# Altium PCB PCB.PcbDoc
Units mm, origin at the board's own origin, x right, y up, seen from the top; angles counter-clockwise.
Board outline 100 x 90 mm, 2 copper layers (Top Layer, Bottom Layer); 61 components, 49 nets, 220 pads, 258 vias.
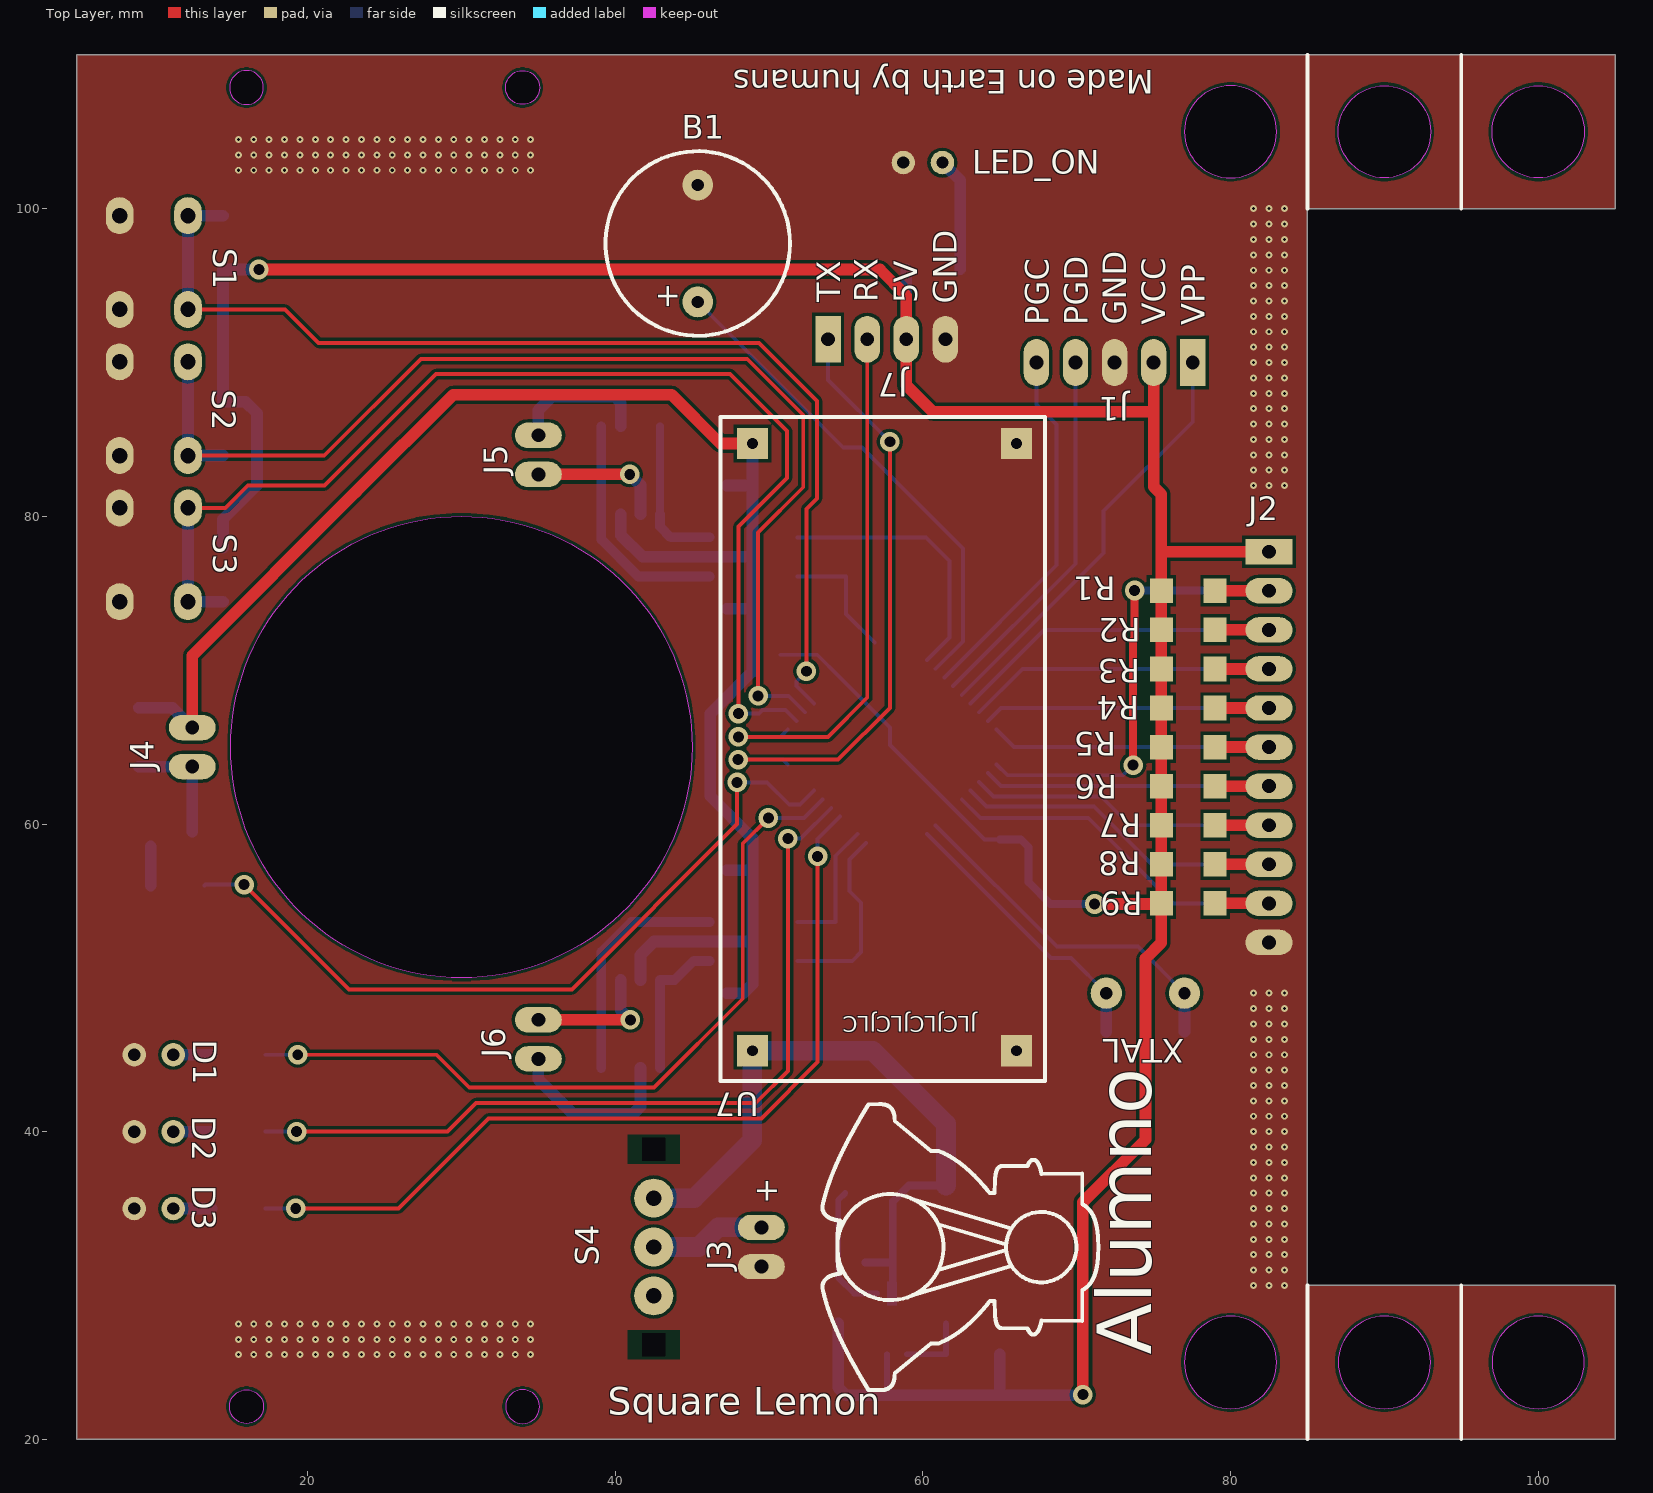
[diagram p0: Top Layer view]
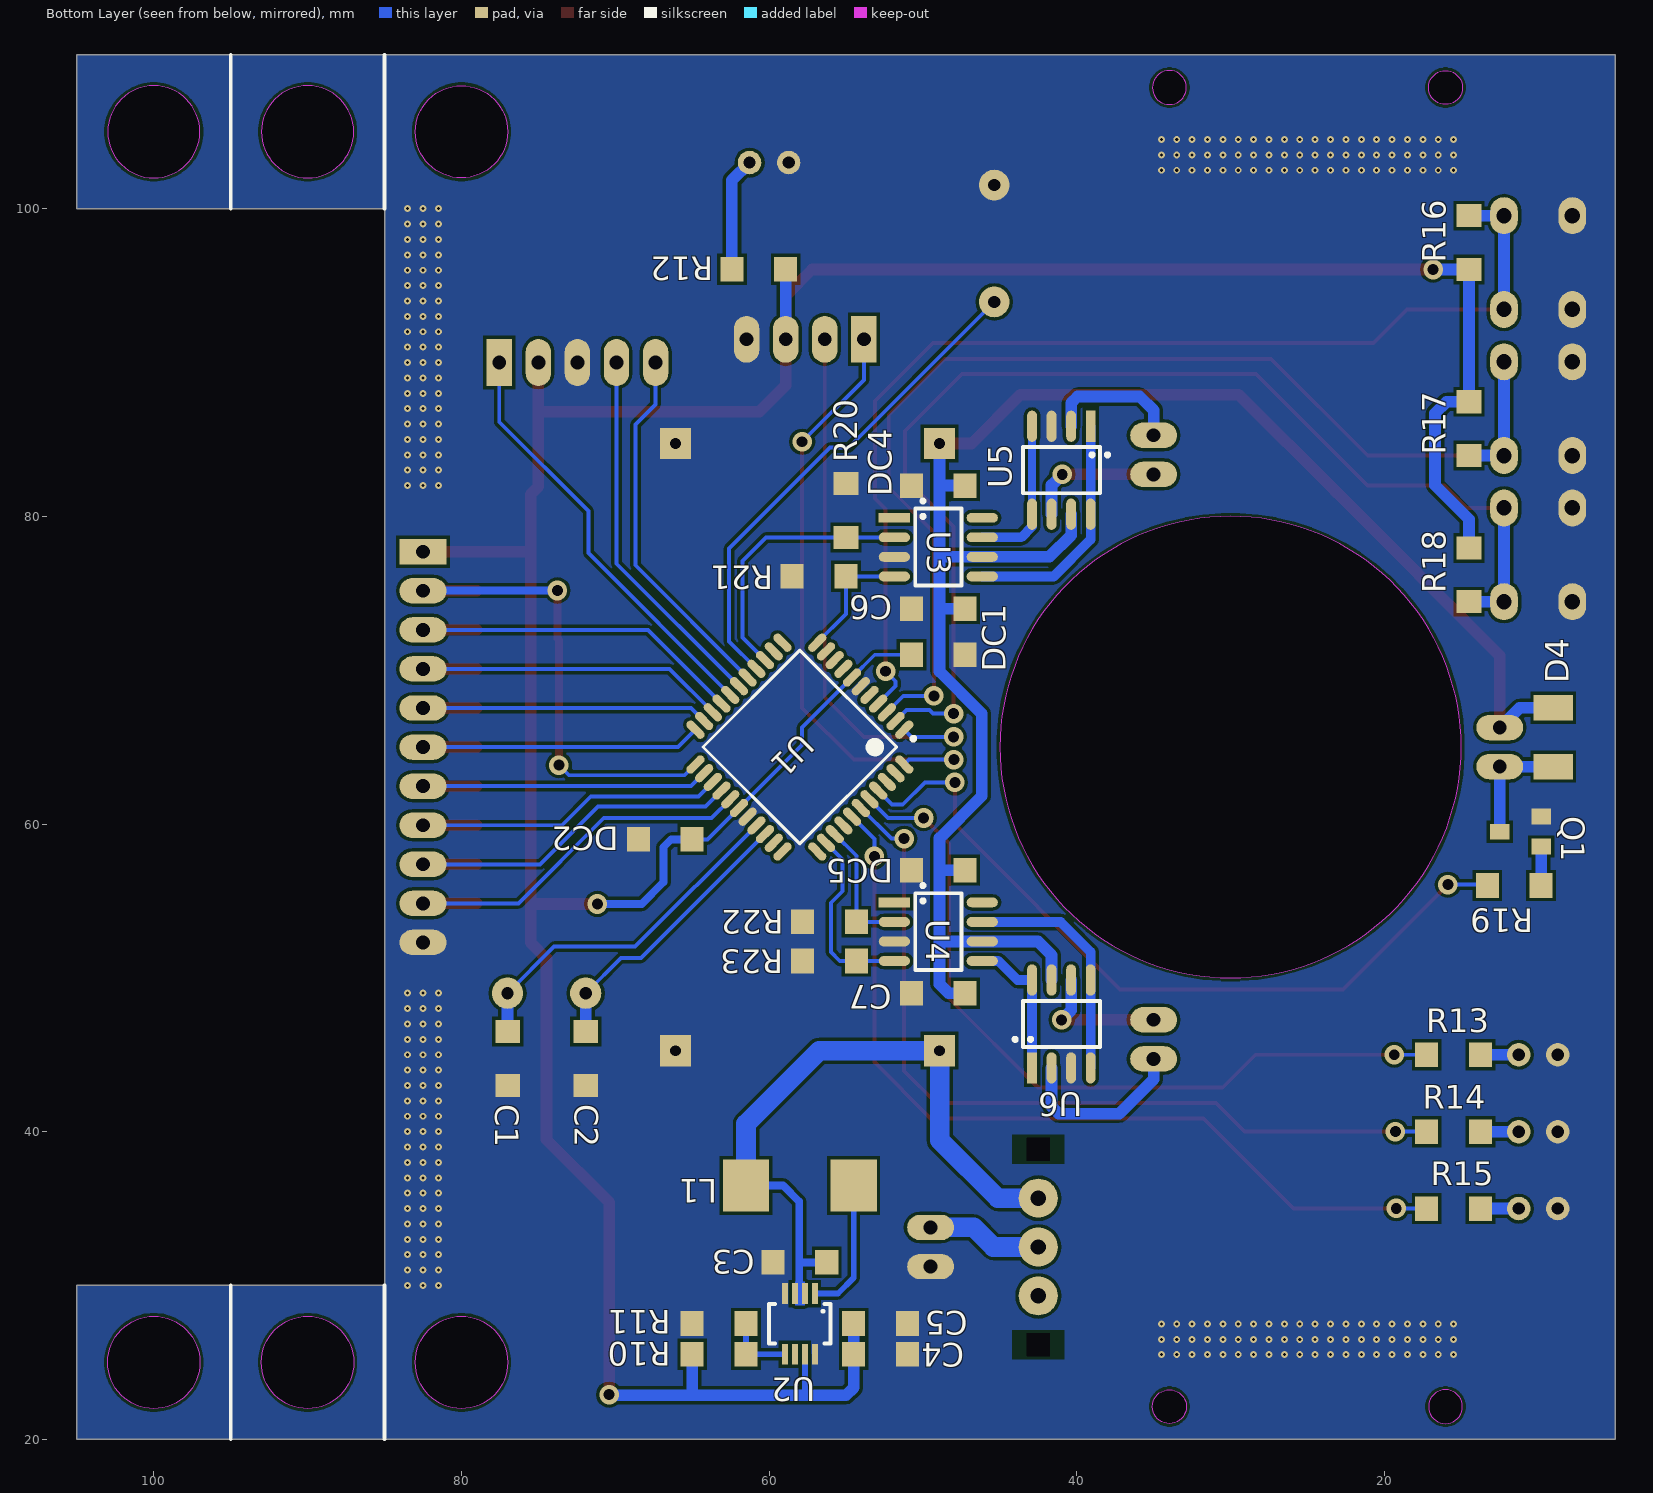
[diagram p1: Bottom Layer view, seen from below]
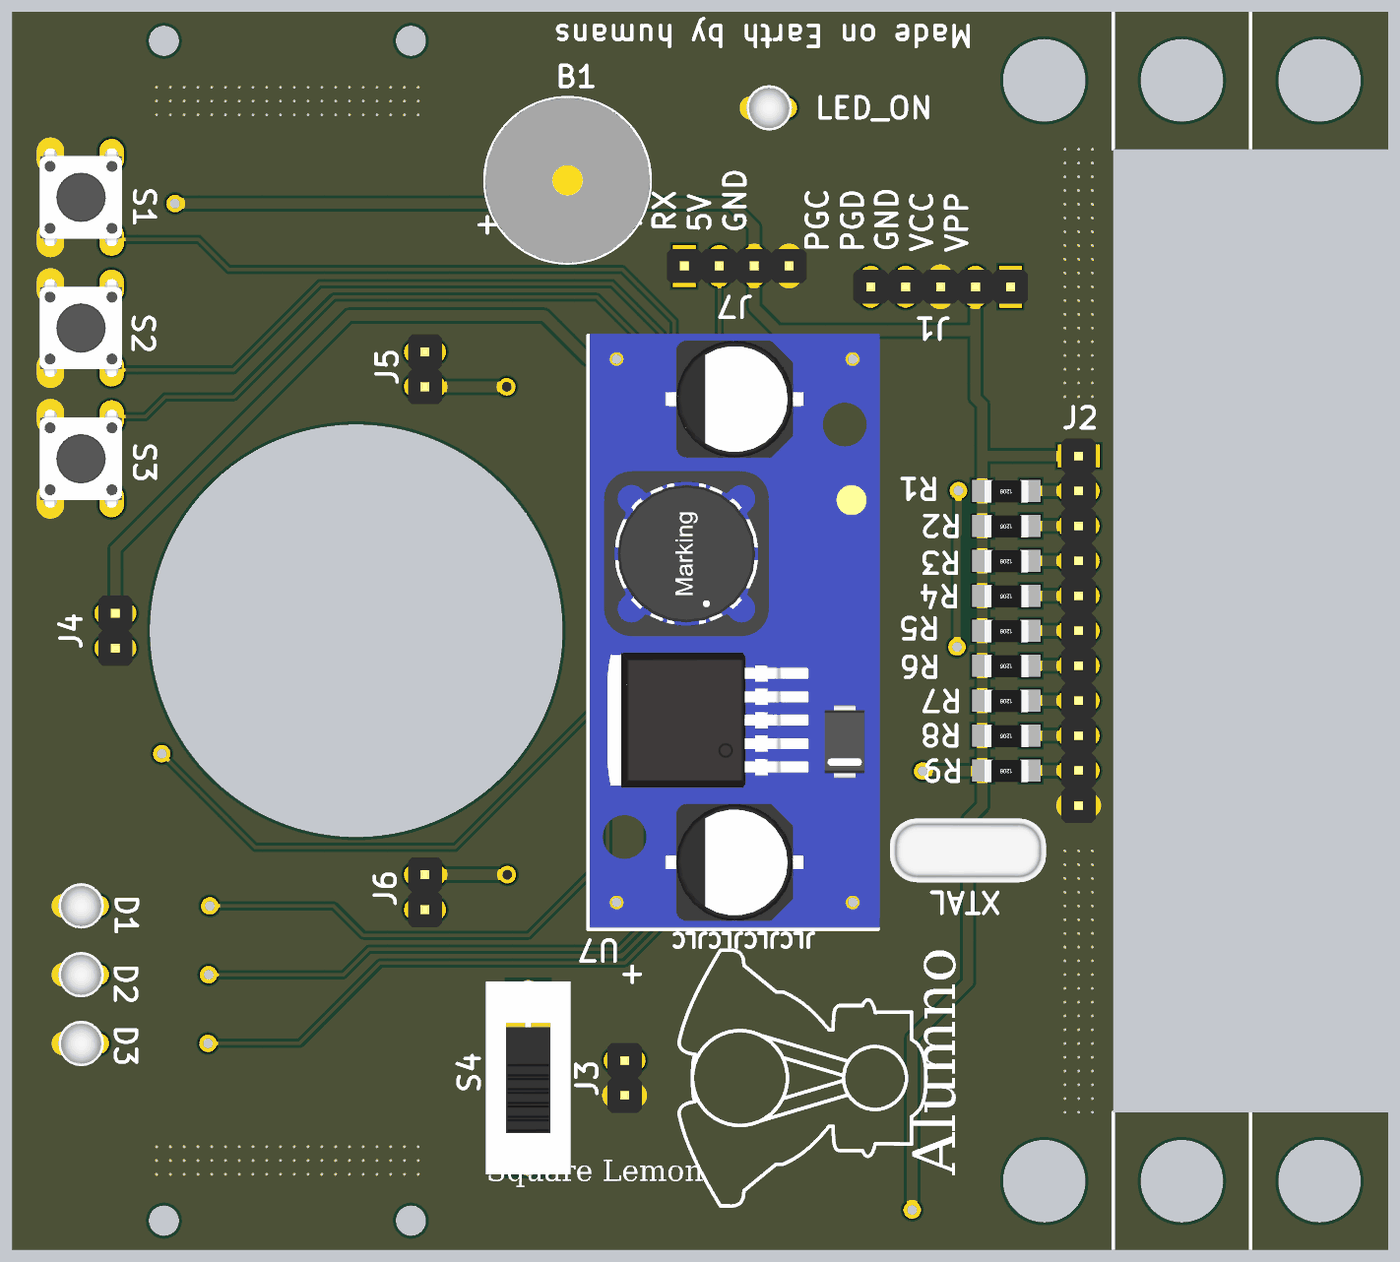
[diagram p2: 3D render of the assembled board from above, using the file's embedded part models]
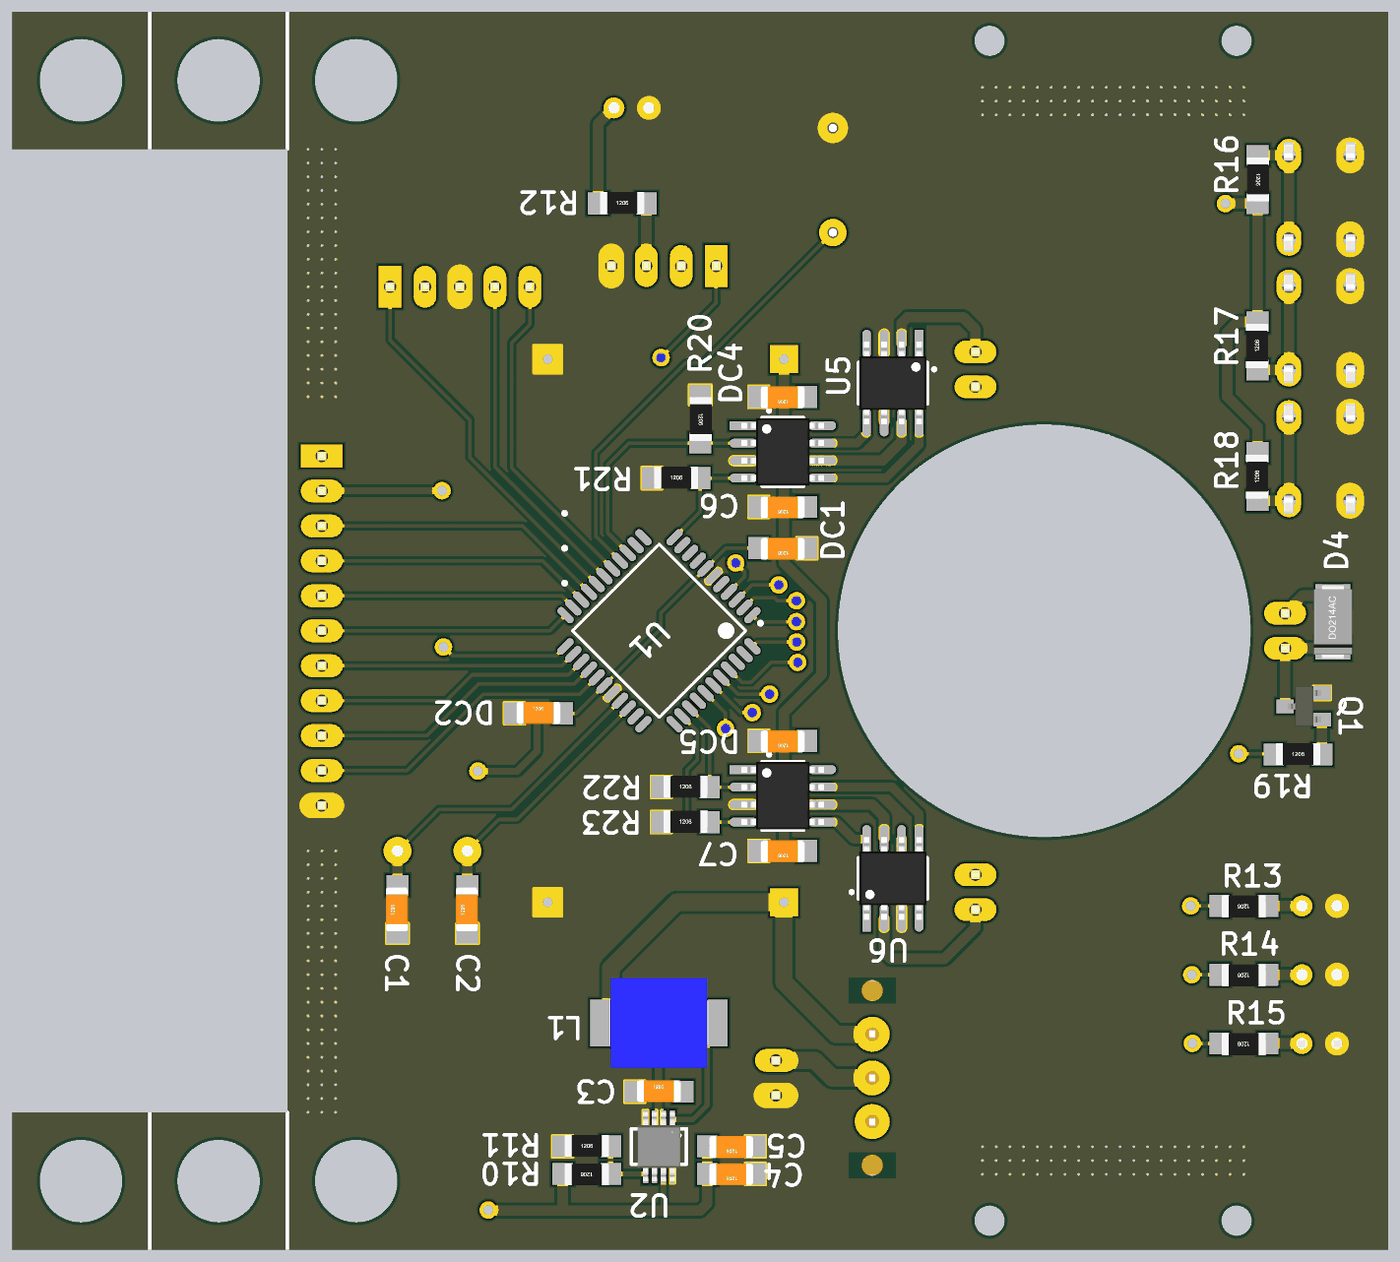
[diagram p3: 3D render of the assembled board from below, using the file's embedded part models]

## Layer stack, top to bottom
Top Solder: solder mask 0.0102, Solder Resist, Dk 3.5
Top Layer: signal copper 0.0356
Dielectric 1: dielectric 0.32, FR-4, Dk 4.8
Bottom Layer: signal copper 0.0356
Bottom Solder: solder mask 0.0102, Solder Resist, Dk 3.5

## Board outline
5,20 5,110 105,110 105,100 85,100 85,30 105,30 105,20 85,20
cut-out: 77,105 ccw(c80,105) 80,102 ccw(c80,105) 83,105 ccw(c80,105) 80,108 ccw(c80,105)
cut-out: 77,25 ccw(c80,25) 80,22 ccw(c80,25) 83,25 ccw(c80,25) 80,28 ccw(c80,25)
cut-out: 100,102 cw(c100,105) 97,105 cw(c100,105) 100,108 cw(c100,105) 103,105 cw(c100,105)
cut-out: 30,50 cw(c30,65) 15,65 cw(c30,65) 30,80 cw(c30,65) 45,65 cw(c30,65)
cut-out: 97,25 ccw(c100,25) 100,22 ccw(c100,25) 103,25 ccw(c100,25) 100,28 ccw(c100,25)
cut-out: 87,25 ccw(c90,25) 90,22 ccw(c90,25) 93,25 ccw(c90,25) 90,28 ccw(c90,25)
cut-out: 90,102 cw(c90,105) 87,105 cw(c90,105) 90,108 cw(c90,105) 93,105 cw(c90,105)
cut-out: 16.025,21.025 cw(c16.025,22.125) 14.925,22.125 cw(c16.025,22.125) 16.025,23.225 cw(c16.025,22.125) 17.125,22.125 cw(c16.025,22.125)
cut-out: 32.875,22.125 ccw(c33.975,22.125) 33.975,21.025 ccw(c33.975,22.125) 35.075,22.125 ccw(c33.975,22.125) 33.975,23.225 ccw(c33.975,22.125)
cut-out: 32.875,107.875 cw(c33.975,107.875) 33.975,108.975 cw(c33.975,107.875) 35.075,107.875 cw(c33.975,107.875) 33.975,106.775 cw(c33.975,107.875)
cut-out: 16.025,108.975 ccw(c16.025,107.875) 14.925,107.875 ccw(c16.025,107.875) 16.025,106.775 ccw(c16.025,107.875) 17.125,107.875 ccw(c16.025,107.875)

## Design rules (kind name [scope] priority, off if disabled: settings)
Clearance [All] p1: gap=0.203
ComponentClearance [All] p1 off: gap=0.254 collisioncheckmode=3 verticalgap=0.254 showdistances=FALSE
HoleSize [All] p1: absolutevalues=TRUE maxlimit=5 minlimit=0.2 maxpercent=80.000 minpercent=20.000
PlaneConnect [All] p1: planeconnectstyle=Direct reliefexpansion=0.508 reliefentries=4 reliefconductorwidth=0.254 reliefairgap=0.254
PolygonConnect [All] p1: connectstyle=Direct reliefconductorwidth=0.381 reliefentries=4 polygonreliefangle="90 Angle" airgapwidth=0.254
RoutingVias [All] p1: holewidth=0.711 width=1.27 viastyle="Through Hole" minholewidth=0.2 minwidth=0.45 maxholewidth=0.711 maxwidth=1.27
SolderMaskExpansion [All] p1: expansion=0.102
Width [All] p1: maxlimit=1.27 minlimit=0.203 preferedwidth=0.254
27 further rules are at their usual default settings.

## Components (designator, comment, footprint, x,y, rotation, side; value= is the part's Value field where it differs from the comment)
B1 "12mm" BUZZER-12MM 45.36,97.74 r90 top
C1 "CAP-CER" C1206 77,44.75 r90 bottom
C2 "CAP-CER" C1206 71.92,44.75 r90 bottom
C3 "CAP-CER" C1206 58,31.5 r180 bottom
C4 "CAP-CER" C1206 52.75,25.525 r0 bottom
C5 "CAP-CER" C1206 52.75,27.525 r0 bottom
C6 "CAP-CER" C1206 49,74 r0 bottom
C7 "CAP-CER" C1206 49,49 r0 bottom
D1 "LED" LED-3MM-RED 10,45 r180 top
D2 "LED" LED-3MM-YELLOW 10,40 r180 top
D3 "LED" LED-3MM-GREEN 10,35 r180 top
D4 "1N4007" DO-214AC 9.02,65.645 r90 bottom
DC1 "CAP-CER" C1206 49,71 r0 bottom
DC2 "CAP-CER" C1206 66.75,59 r180 bottom
DC4 "CAP-CER" C1206 49,82 r0 bottom
DC5 "CAP-CER" C1206 49,57 r0 bottom
J1 "PICkit" "Header 1x5" 77.54,90 r270 top
J2 "Sensores" "Header 1x11" 82.5,77.7 r0 top
J3 "BAT" "HEADER 1x2" 49.5,32.5 r0 top
J4 "EDF" "HEADER 1x2" 12.5,65 r0 top
J5 "MOTI" "HEADER 1x2" 35,84 r0 top
J6 "MOTD" "HEADER 1x2" 35,46 r180 top
J7 "UART" "Header 1x4" 57.65,91.51 r90 top
L1 "CDM6D28NP-2R2MC" CDMC6D28 58,36.5 r180 bottom
LED_ON "LED" LED-3MM-RED 60,103 r180 top
Q1 "MMBT2222A" SOT-23 13.008,52.515 r90 bottom
R1 "RES" R1206 77.25,75.16 r180 top
R2 "RES" R1206 77.25,72.62 r180 top
R3 "RES" R1206 77.25,70.08 r180 top
R4 "RES" R1206 77.25,67.54 r180 top
R5 "RES" R1206 77.25,65 r180 top
R6 "RES" R1206 77.25,62.46 r180 top
R7 "RES" R1206 77.25,59.92 r180 top
R8 "RES" R1206 77.25,57.38 r180 top
R9 "RES" R1206 77.25,54.84 r180 top
R10 "RES" R1206 63.25,25.525 r0 bottom
R11 "RES" R1206 63.25,27.525 r180 bottom
R12 "RES" R1206 60.67,96.06 r180 bottom
R13 "RES" R1206 15.5,45 r0 bottom
R14 "RES" R1206 15.5,40 r0 bottom
R15 "RES" R1206 15.5,35 r0 bottom
R16 "RES" R1206 14.5,97.798 r270 bottom
R17 "RES" R1206 14.5,85.702 r90 bottom
R18 "RES" R1206 14.5,76.202 r90 bottom
R19 "RES" R1206 11.558,56 r180 bottom
R20 "RES" R1206 55,80.385 r270 bottom
R21 "RES" R1206 56.75,76.095 r180 bottom
R22 "RES" R1206 56.08,53.635 r180 bottom
R23 "RES" R1206 56.08,51.095 r180 bottom
S1 "BUTTON" TACT_SWITCH-SMALL-4PIN 10,96.5 r90 top
S2 "BUTTON" TACT_SWITCH-SMALL-4PIN 10,87 r90 top
S3 "BUTTON" TACT_SWITCH-SMALL-4PIN 10,77.5 r90 top
S4 "SLIDE-SWITCH" SWITCH 42.5,32.5 r270 top
U1 "PIC18F4550-I/PT" TQFP-PT44_L 58,65 r315 bottom
U2 "PAM2401" MSOP-8 58,27.5 r270 bottom
U3 "MIC4427" SOIC-8 49,78 r180 bottom
U4 "MIC4427" SOIC-8 49,53 r180 bottom
U5 "ZXMHC3F381N8" SOIC-8 41,83 r270 bottom
U6 "ZXMHC3F381N8" SOIC-8 41,47 r90 bottom
U7 "XL6009 Module" "XL6009 mdl" 57.5,65 r90 top
XTAL "XTAL" HC-49/S 74.46,49 r0 top

## Footprints (in the part's own frame and the unit in brackets; to place one, negate y for a bottom-side part, rotate by r counter-clockwise, add the part's x,y. Pads: shape width x height; smd on the part's side, far side on the other; paste and mask are expansions set on the pad)
BUZZER-12MM [mm]
  round 2 hole 0.8: 1(-3.8,0) 2(3.8,0)
  silkscreen extent -6,-6 6,6, body extent -6,-6 6,6, height 9.5
C1206 [mm]
  rect 1.5x1.6 smd: 1(-1.75,0) 2(1.75,0)
  body extent -1.6,-0.76 1.6,0.84, height 1.26
CDMC6D28 [mm]
  rect 3x3.4 smd: 1(-3.5,0) 2(3.5,0)
  body extent -3.62,-3.25 3.62,3.25, height 3
DO-214AC [mm]
  rect 1.651x2.54 smd: A(-1.915,0) K(1.915,0)
  body extent -2.74,-1.4 2.74,1.4, height 2.29
HC-49/S [mil]
  round 80 hole 31.5: 1(-100,0) 2(100,0)
  body extent -223,-90 223,93, height 138
"HEADER 1x2" [mil]
  oval 120x65 hole 35.43: 1(0,50) 2(0,-50)
  body extent -49,-100 49,100, height 336
"Header 1x4" [mil]
  rect 120x65 hole 35.43: 1(0,150)
  oval 120x65 hole 35.43: 2(0,50) 3(0,-50) 4(0,-150)
  body extent -49,-200 49,200, height 336
"Header 1x5" [mil]
  rect 120x65 hole 35.43: 1(0,0)
  oval 120x65 hole 35.43: 2(0,-100) 3(0,-200) 4(0,-300) 5(0,-400)
  body extent -49,-450 49,50, height 336
"Header 1x11" [mil]
  rect 120x65 hole 35.43: 1(0,0)
  oval 120x65 hole 35.43: 2(0,-100) 3(0,-200) 4(0,-300) 5(0,-400) 6(0,-500) 7(0,-600) 8(0,-700) 9(0,-800) 10(0,-900) 11(0,-1000)
  body extent -49,-1050 49,50, height 336
LED-3MM-GREEN [mil]
  round 60 hole 31.5: A(-50,0) K(50,0)
  body extent -66,-65 64,65, height 217
LED-3MM-RED [mil]
  round 60 hole 31.5: A(-50,0) K(50,0)
  body extent -66,-65 64,65, height 217
LED-3MM-YELLOW [mil]
  round 60 hole 31.5: A(-50,0) K(50,0)
  body extent -66,-65 64,65, height 217
MSOP-8 [mm]
  rect 1.35x0.381 smd: 1(-1.975,0.975) 2(-1.975,0.325) 3(-1.975,-0.325) 4(-1.975,-0.975) 5(1.975,-0.975) 6(1.975,-0.325) 7(1.975,0.325) 8(1.975,0.975)
  silkscreen extent -1.3,-2 1.28,2, body extent -2.53,-1.55 2.53,1.55, height 1.09
R1206 [mm]
  rect 1.5x1.6 smd: 1(-1.75,0) 2(1.75,0)
  body extent -1.6,-0.76 1.6,0.84, height 0.68
SOIC-8 [mil]
  rect 80x25 smd: 1(-112.5,75)
  oval 80x25 smd: 2(-112.5,25) 3(-112.5,-25) 4(-112.5,-75) 5(112.5,-75) 6(112.5,-25) 7(112.5,25) 8(112.5,75)
  silkscreen extent -59,-98 59,122, body extent -118,-96 118,96, height 69
SOT-23 [mm]
  rect 1.016x1.27 smd: B(6.025,-3.2) C(6.985,-0.508) E(7.975,-3.2)
  body extent 5.54,-3.15 8.46,-0.67, height 0.95
SWITCH [mm]
  round 2.54 hole 1: 1(-3.175,0) 2(0,0) 3(3.175,0)
  round 0 hole 1.5 square: 4(-6.35,0)
  rect 0x0 hole 1.5 square: 4(6.35,0)
  body extent -7,-3.1 7,3.1, height 9.65
TACT_SWITCH-SMALL-4PIN [mm]
  oval 2.4x1.8 hole 1: 1(-3.048,2.222) 1(3.048,2.223) 2(-3.048,-2.223) 2(3.048,-2.222)
  body extent -3.99,-3 3.99,3, height 5.15
TQFP-PT44_L [mm] "Thin QFP, 44-Leads, Body 10x10mm, Pitch 0.8mm, IPC High Density"
  oval 1.45x0.55 smd: 1(-5.6,4) 2(-5.6,3.2) 3(-5.6,2.4) 4(-5.6,1.6) 5(-5.6,0.8) 6(-5.6,0) 7(-5.6,-0.8) 8(-5.6,-1.6) 9(-5.6,-2.4) 10(-5.6,-3.2) 11(-5.6,-4) 23(5.6,-4) 24(5.6,-3.2) 25(5.6,-2.4) 26(5.6,-1.6) 27(5.6,-0.8) 28(5.6,0) 29(5.6,0.8) 30(5.6,1.6) 31(5.6,2.4) 32(5.6,3.2) 33(5.6,4)
  oval 0.55x1.45 smd: 12(-4,-5.6) 13(-3.2,-5.6) 14(-2.4,-5.6) 15(-1.6,-5.6) 16(-0.8,-5.6) 17(0,-5.6) 18(0.8,-5.6) 19(1.6,-5.6) 20(2.4,-5.6) 21(3.2,-5.6) 22(4,-5.6) 34(4,5.6) 35(3.2,5.6) 36(2.4,5.6) 37(1.6,5.6) 38(0.8,5.6) 39(0,5.6) 40(-0.8,5.6) 41(-1.6,5.6) 42(-2.4,5.6) 43(-3.2,5.6) 44(-4,5.6)
  silkscreen extent -5.72,-4.45 4.45,4.95, body extent -5,-5 5,5, height 1.2
"XL6009 mdl" [mil]
  rect 80x80 hole 27.56: 0(-777,338) 1(-777,-338) 2(777,-338) 3(777,338)
  silkscreen extent -855,-411 845,419, body extent -850,-415 850,415, height 502

## Part data
B1: library part BUZZER-ACTIVE
D4: library part DIODE
J2: library part "Header 1x11"
J3 J4 J5 J6: library part "Header 1x2"
J7: library part "Header 1x4"
L1: library part INDUCTOR
Q1: library part NPN
U1: "High Performance, Enhanced Flash, USB Microcontroller with nanoWatt Technology, 32K Flash, 44-Pin TQFP, Industrial Temperature Range"
U3 U4: library part 4427

## Via types
v1: diameter 0.45, hole 0.2, Top Layer to Bottom Layer, tented both sides, 237 vias
v2: diameter 1.27, hole 0.711, Top Layer to Bottom Layer, 21 vias

## Nets (pads, with @x,y where several pads share a name; then routed paths per layer and width w, separated by ;. In a path a pad name is that pad's centre, name@x,y a point inside that pad or via, vN(x,y) a via of type N, cw(c..) or ccw(c..) an arc to the next point about the centre after c; other vN are vias at no path point)
BTN1: R16.1 S1.2 U1.4 | length 72.4
  Top Layer w0.254: S1.2@12.223,93.452 18.528,93.452 20.72,91.26 49.34,91.26 53.11,87.49 53.11,81.17 52.42,80.48 v2(52.42,69.93)
  Bottom Layer w0.254: v2(52.42,69.93) 51.77,69.28 51.77,68.967 U1.4
  Bottom Layer w0.762: S1.2@12.223,93.452 12.223,99.548 R16.1
BTN2: R17.1 S2.2 U1.3 | length 75.4
  Top Layer w0.254: S2.2@12.223,83.952 21.082,83.952 27.36,90.23 48.58,90.23 52.22,86.59 52.22,81.89 49.29,78.96 v2(49.29,68.33)
  Bottom Layer w0.254: v2(49.29,68.33) 51.276,68.33 U1.3
  Bottom Layer w0.762: S2.2@12.223,90.048 12.223,83.952 R17.1
BTN3: R18.1 S3.2 U1.2 | length 76.3
  Top Layer w0.254: S3.2@12.223,80.548 14.658,80.548 16.11,82 21.1,82 28.35,89.25 47.47,89.25 51.17,85.55 51.17,82.5 48.01,79.34 v2(48.01,67.18)
  Bottom Layer w0.254: v2(48.01,67.18) 49.35,67.18 49.57,67.4 51.075,67.4 U1.2
  Bottom Layer w0.762: S3.2@12.223,80.548 12.223,74.452 R18.1
BUZZER: B1.1 U1.15 | length 32.4
  Bottom Layer w0.254: B1.1 54.82,84.48 56.03,84.48 62.6,77.91 62.6,71.863 U1.15
EDF: R19.1 U1.41 | length 50.6
  Top Layer w0.254: v2(15.87,56.06) 22.68,49.25 37.18,49.25 47.92,59.99 v2(47.92,62.7)
  Bottom Layer w0.254: R19.1 13.368,56.06 v2(15.87,56.06) ; v2(47.92,62.7) 49.87,62.7 51.31,61.26 51.997,61.26 U1.41
GND: B1.2 C1.1 C2.1 C3.1 C4.1 C5.1 C6.2 C7.2 D1.K D2.K D3.K DC1.1 DC2.1 DC4.2 DC5.2 J1.3 J2.11 J3.2 J7.4 LED_ON.K Q1.E R11.1 R20.1 R21.1 R22.1 R23.1 S1.1 S2.1 S3.1 U1.6 U1.29 U2.4 U2.8 U3.3 U4.3 U5.3 U6.3 U7.1 U7.2
  other v1: 15.5,25.5 16.5,25.5 17.5,25.5 18.5,25.5 19.5,25.5 20.5,25.5 21.5,25.5 22.5,25.5 23.5,25.5 24.5,25.5 25.5,25.5 26.5,25.5 27.5,25.5 28.5,25.5 29.5,25.5 30.5,25.5 31.5,25.5 32.5,25.5 33.5,25.5 34.5,25.5 15.5,26.5 16.5,26.5 17.5,26.5 18.5,26.5 19.5,26.5 20.5,26.5 21.5,26.5 22.5,26.5 23.5,26.5 24.5,26.5 25.5,26.5 26.5,26.5 27.5,26.5 28.5,26.5 29.5,26.5 30.5,26.5 31.5,26.5 32.5,26.5 33.5,26.5 34.5,26.5 15.5,27.5 16.5,27.5 17.5,27.5 18.5,27.5 19.5,27.5 20.5,27.5 21.5,27.5 22.5,27.5 23.5,27.5 24.5,27.5 25.5,27.5 26.5,27.5 27.5,27.5 28.5,27.5 29.5,27.5 30.5,27.5 31.5,27.5 32.5,27.5 33.5,27.5 34.5,27.5 81.5,30 82.5,30 83.5,30 81.5,31 82.5,31 83.5,31 81.5,32 82.5,32 83.5,32 81.5,33 82.5,33 83.5,33 81.5,34 82.5,34 83.5,34 81.5,35 82.5,35 83.5,35 81.5,36 82.5,36 83.5,36 81.5,37 82.5,37 83.5,37 81.5,38 82.5,38 83.5,38 81.5,39 82.5,39 83.5,39 81.5,40 82.5,40 83.5,40 81.5,41 82.5,41 83.5,41 81.5,42 82.5,42 83.5,42 81.5,43 82.5,43 83.5,43 81.5,44 82.5,44 83.5,44 81.5,45 82.5,45 83.5,45 81.5,46 82.5,46 83.5,46 81.5,47 82.5,47 83.5,47 81.5,48 82.5,48 83.5,48 81.5,49 82.5,49 83.5,49 81.5,82 82.5,82 83.5,82 81.5,83 82.5,83 83.5,83 81.5,84 82.5,84 83.5,84 81.5,85 82.5,85 83.5,85 81.5,86 82.5,86 83.5,86 81.5,87 82.5,87 83.5,87 81.5,88 82.5,88 83.5,88 81.5,89 82.5,89 83.5,89 81.5,90 82.5,90 83.5,90 81.5,91 82.5,91 83.5,91 81.5,92 82.5,92 83.5,92 81.5,93 82.5,93 83.5,93 81.5,94 82.5,94 83.5,94 81.5,95 82.5,95 83.5,95 81.5,96 82.5,96 83.5,96 81.5,97 82.5,97 83.5,97 81.5,98 82.5,98 83.5,98 81.5,99 82.5,99 83.5,99 81.5,100 82.5,100 83.5,100 15.5,102.5 16.5,102.5 17.5,102.5 18.5,102.5 19.5,102.5 20.5,102.5 21.5,102.5 22.5,102.5 23.5,102.5 24.5,102.5 25.5,102.5 26.5,102.5 27.5,102.5 28.5,102.5 29.5,102.5 30.5,102.5 31.5,102.5 32.5,102.5 33.5,102.5 34.5,102.5 15.5,103.5 16.5,103.5 17.5,103.5 18.5,103.5 19.5,103.5 20.5,103.5 21.5,103.5 22.5,103.5 23.5,103.5 24.5,103.5 25.5,103.5 26.5,103.5 27.5,103.5 28.5,103.5 29.5,103.5 30.5,103.5 31.5,103.5 32.5,103.5 33.5,103.5 34.5,103.5 15.5,104.5 16.5,104.5 17.5,104.5 18.5,104.5 19.5,104.5 20.5,104.5 21.5,104.5 22.5,104.5 23.5,104.5 24.5,104.5 25.5,104.5 26.5,104.5 27.5,104.5 28.5,104.5 29.5,104.5 30.5,104.5 31.5,104.5 32.5,104.5 33.5,104.5 34.5,104.5
IR1: J2.2 R1.1 U1.23 | length 33.1
  Top Layer w0.508: v2(73.66,63.823) 73.66,71.96 73.75,72.05 73.75,75.17 v2(73.76,75.18)
  Top Layer w0.762: R1.1 J2.2
  Bottom Layer w0.254: U1.23 65.487,63.17 73.007,63.17 v2(73.66,63.823)
  Bottom Layer w0.508: v2(73.76,75.18) 82.48,75.18 J2.2
IR2: J2.3 R2.1 U1.19 | length 24.9
  Top Layer w0.762: R2.1 J2.3
  Bottom Layer w0.254: U1.19 67.883,72.62 J2.3
IR3: J2.4 R3.1 U1.20 | length 23.5
  Top Layer w0.762: R3.1 J2.4
  Bottom Layer w0.254: U1.20 66.474,70.08 J2.4
IR4: J2.5 R4.1 U1.21 | length 22.1
  Top Layer w0.762: R4.1 J2.5
  Bottom Layer w0.254: U1.21 65.065,67.54 J2.5
IR5: J2.6 R5.1 U1.22 | length 21.7
  Top Layer w0.762: R5.1 J2.6
  Bottom Layer w0.254: U1.22 65.92,65 J2.6
IR6: J2.7 R6.1 U1.24 | length 22.1
  Top Layer w0.762: R6.1 J2.7
  Bottom Layer w0.254: U1.24 65.065,62.46 J2.7
IR7: J2.8 R7.1 U1.25 | length 23.5
  Top Layer w0.762: R7.1 J2.8
  Bottom Layer w0.254: U1.25 64.594,61.8 71.594,61.8 73.474,59.92 J2.8
IR8: J2.9 R8.1 U1.26 | length 24.9
  Top Layer w0.762: R8.1 J2.9
  Bottom Layer w0.254: U1.26 64.123,61.14 71.123,61.14 74.883,57.38 J2.9
IR9: J2.10 R9.1 U1.27 | length 26.3
  Top Layer w0.762: R9.1 J2.10
  Bottom Layer w0.254: U1.27 63.751,60.38 70.751,60.38 76.291,54.84 J2.10
LED1: R13.2 U1.40 | length 50.8
  Top Layer w0.254: v2(19.36,45) 28.38,45 30.51,42.87 42.52,42.87 48.29,48.64 48.29,58.72 v2(49.96,60.39)
  Bottom Layer w0.254: R13.2 v2(19.36,45) ; v2(49.96,60.39) 52.259,60.39 U1.40
LED2: R14.2 U1.39 | length 54.4
  Top Layer w0.254: v2(19.28,40) 29.09,40 30.95,41.86 49.13,41.86 51.22,43.95 v2(51.22,59.05)
  Bottom Layer w0.254: R14.2 v2(19.28,40) ; v2(51.22,59.05) 52.05,59.05 U1.39
LED3: R15.2 U1.38 | length 56.4
  Top Layer w0.254: v2(19.23,35.01) 25.9,35.01 31.75,40.86 49.5,40.86 53.16,44.52 v2(53.16,57.89)
  Bottom Layer w0.254: R15.2 19.22,35 v2(19.23,35.01) ; v2(53.16,57.89) 53.16,59.029 U1.38
MOTDD: R23.2 U1.35 U4.4 | length 12.2
  Bottom Layer w0.254: U4.4 R23.2 55.405,51.095 55.98,51.67 55.98,54.88 55.23,55.63 55.23,57.705 U1.35
MOTDP: R22.2 U1.36 U4.2 | length 8.8
  Bottom Layer w0.254: U4.2 R22.2 54.33,57.936 U1.36
MOTID: R20.2 U1.14 U3.2 | length 17.6
  Bottom Layer w0.254: U3.2 60.205,78.635 61.73,77.11 61.73,72.124 U1.14
MOTIP: R21.2 U1.11 U3.4 | length 8.2
  Bottom Layer w0.254: U3.4 R21.2 55,73.657 U1.11
NetD1_A: D1.A R13.1 | length 2.5
  Bottom Layer w0.762: D1.A R13.1
NetD2_A: D2.A R14.1 | length 2.5
  Bottom Layer w0.762: D2.A R14.1
NetD3_A: D3.A R15.1 | length 2.5
  Bottom Layer w0.762: D3.A R15.1
NetD4_A: D4.A J4.2 Q1.C | length 7.7
  Bottom Layer w0.762: D4.A J4.2 Q1.C
NetJ3_1: J3.1 S4.2 | length 7.5
  Bottom Layer w1.27: S4.2 45.42,32.5 46.69,33.77 J3.1
NetJ5_1: J5.1 U5.2 | length 9
  Bottom Layer w0.762: J5.1 35,86.89 35.9,87.79 39.95,87.79 40.365,87.375 U5.2
NetJ5_2: J5.2 U5.6 | length 8.8
  Top Layer w0.762: J5.2 v2(40.94,82.73)
  Bottom Layer w0.762: v2(40.94,82.73) 41.635,82.035 U5.6
NetJ6_1: J6.1 U6.2 | length 11.6
  Bottom Layer w0.762: J6.1 35,43.4 37.24,41.16 41.18,41.16 41.635,41.615 U6.2
NetJ6_2: J6.2 U6.6 | length 8.8
  Top Layer w0.762: J6.2 v2(40.98,47.27)
  Bottom Layer w0.762: U6.6 40.365,47.885 v2(40.98,47.27)
NetL1_2: L1.2 U2.1 | length 8.6
  Bottom Layer w0.381: L1.2@54.95,36 54.5,35.55 54.5,30.5 55.525,29.475 U2.1
NetLED_ON_A: LED_ON.A R12.1 | length 7.4
  Bottom Layer w0.762: LED_ON.A 62.42,101.85 R12.1
NetQ1_B: Q1.B R19.2 | length 2.5
  Bottom Layer w0.762: R19.2 Q1.B
NetR10_1: R10.1 R11.2 U2.5 | length 4.5
  Bottom Layer w0.381: U2.5 R10.1 R11.2
NetU3_5: U3.5 U5.1 U5.8 | length 15.4
  Bottom Layer w0.635: U5.1 U5.8 39.095,78.495 41.495,76.095 U3.5
NetU3_7: U3.7 U5.4 U5.5 | length 10
  Bottom Layer w0.508: U5.5 U5.4
  Bottom Layer w0.635: U5.5 42.905,79.335 43.605,78.635 U3.7
NetU4_5: U4.5 U6.1 U6.8 | length 9.5
  Bottom Layer w0.635: U6.1 U6.8 43.858,49.857 45.095,51.095 U4.5
NetU4_7: U4.7 U6.4 U6.5 | length 15.4
  Bottom Layer w0.635: U6.4 U6.5 39.095,51.685 41.045,53.635 U4.7
PGC: J1.5 U1.16 | length 24
  Bottom Layer w0.254: U1.16 68.69,76.821 68.69,85.97 67.38,87.28 J1.5
PGD: J1.4 U1.17 | length 24.3
  Bottom Layer w0.254: U1.17 69.92,76.92 J1.4
RX: J7.2 U1.1 | length 36.1
  Top Layer w0.254: v2(48.01,65.66) 53.82,65.66 56.38,68.22 J7.2
  Bottom Layer w0.254: v2(48.01,65.66) 50.74,65.66 U1.1
TX: J7.1 U1.44 | length 40.2
  Top Layer w0.254: v2(47.99,64.18) 54.49,64.18 57.85,67.54 v2(57.85,84.85)
  Bottom Layer w0.254: v2(47.99,64.18) 50.9,64.18 U1.44 ; J7.1 53.84,88.86 v2(57.85,84.85)
VBAT: C3.2 L1.1 S4.1 U2.2 U2.3 U7.0 | length 44
  Bottom Layer w0.508: C3.2 58.04,31.5 ; 58.04,29.48 58.04,31.5 ; L1.1 59.09,36.5 58.04,35.45 58.04,31.5
  Bottom Layer w1.27: S4.1 45.135,35.675 48.915,39.455 U7.0 56.736,45.264 61.5,40.5 L1.1
VCC: C4.2 C5.2 DC1.2 DC2.2 J1.2 J2.1 J7.3 R1.2 R2.2 R3.2 R4.2 R5.2 R6.2 R7.2 R8.2 R9.2 R10.2 R12.2 R16.2 R17.2 R18.2 U1.7 U1.28 U2.7 | length 228.6
  Top Layer w0.762: v2(16.832,96.048) 57.212,96.048 58.92,94.34 J7.3 58.92,88.51 60.63,86.8 75,86.8 ; v2(70.4,22.9) 70.4,35.41 74.47,39.48 74.47,51.25 75.5,52.28 R9.2 ; v2(71.16,54.8) 75.46,54.8 R9.2 ; J1.2 75,86.8 ; J2.1 75.5,77.7 ; 75,86.8 75,81.93 75.5,81.43 75.5,77.7 ; R9.2 R8.2 R7.2 R6.2 R5.2 R4.2 R3.2 R2.2 R1.2 75.5,77.7
  Bottom Layer w0.254: DC1.2 53.131,71 U1.7 57.86,66.271 57.86,65.14 U1.28 64,59 DC2.2
  Bottom Layer w0.381: 57.675,22.86 U2.7 ; v2@70.36,22.86 v2(70.4,22.9)
  Bottom Layer w0.508: DC2.2 66.36,59 66.87,58.49 66.87,56.21 68.28,54.8 v2(71.16,54.8)
  Bottom Layer w0.762: R18.2 14.5,79.82 16.71,82.03 16.71,86.7 15.958,87.452 R17.2 R16.2 v2(16.832,96.048) ; C5.2 C4.2 54.5,23.36 55,22.86 57.675,22.86 65,22.86 ; J7.3 R12.2 ; R10.2 65,22.86 ; v2@70.36,22.86 65,22.86
VMOT: C6.1 C7.1 D4.K DC4.1 DC5.1 J4.1 U3.6 U4.6 U5.7 U6.7 U7.3 | length 117.5
  Top Layer w0.762: J4.1 12.5,70.95 23.14,81.59 29.46,87.91 43.662,87.91 46.836,84.736 U7.3
  Bottom Layer w0.762: D4.K 11.21,67.56 J4.1 ; U5.7 40.365,78.775 41.775,77.365 U3.6 48.915,77.365 ; U6.7 41.635,51.475 42.525,52.365 U4.6 48.915,52.365 ; C7.1 48.33,49 48.915,49.585 48.915,52.365 ; DC5.1 48.915,57 ; C6.1 48.915,74 ; DC4.1 48.915,82 ; U7.3 48.915,82 ; 48.915,52.365 48.915,57 ; 48.915,57 48.915,59.085 46.18,61.82 46.18,67.18 48.915,69.915 48.915,74 ; 48.915,74 48.915,77.365 ; 48.915,77.365 48.915,82
VPP: J1.1 U1.18 | length 27.8
  Bottom Layer w0.254: U1.18 71.74,77.609 71.74,80.34 77.54,86.14 J1.1
XTAL1: C1.2 U1.30 XTAL.2 | length 23.2
  Bottom Layer w0.254: U1.30 68.707,52.03 73.97,52.03 XTAL.2
  Bottom Layer w0.762: C1.2 XTAL.2
XTAL2: C2.2 U1.31 XTAL.1 | length 18.4
  Bottom Layer w0.254: U1.31 68.326,51.28 69.64,51.28 XTAL.1
  Bottom Layer w0.762: C2.2 XTAL.1
pads on no net: S4.3 S4.4 U1.5 U1.8 U1.9 U1.10 U1.12 U1.13 U1.32 U1.33 U1.34 U1.37 U1.42 U1.43 U2.6 U3.1 U3.8 U4.1 U4.8

## Polygon pours and split planes (outlines as drawn)
GND on Bottom Layer "BOT-GND" (solid, remove dead copper, pour order 0): 5,20 5,110 105,110 105,100 85,100 85,30 105,30 105,20 85,20
GND on Top Layer "TOP-GND" (solid, remove dead copper, pour order 2): 5,20 5,110 105,110 105,100 85,100 85,30 105,30 105,20 85,20

## Other copper
Bottom Layer:
  rectangle net VBAT: 57.675,28.7 58.325,30.27

## Silkscreen, mask and mechanical layers (free items; w line width, h text height)
Top Overlay:
  drawing of 4426 lines, arcs and shapes, not listed
  text "Made on Earth by humans" at 75,109 h1.52 r180
  text "TX" at 54.61,93.93 h1.52 r90
  text "RX" at 57.06,93.91 h1.52 r90
  text "5V" at 59.63,93.87 h1.52 r90
  text "GND" at 62.19,93.82 h1.52 r90
  text "GND" at 73.23,92.45 h1.52 r90
  text "VCC" at 75.77,92.45 h1.52 r90
  text "PGC" at 68.17,92.43 h1.52 r90
  text "PGD" at 70.73,92.41 h1.52 r90
  text "VPP" at 78.31,92.41 h1.52 r90
  text "JLCJLCJLCJLC" at 63.5,47.5 h1.02 r180
  text "+" at 49,35.5 h1.52
  text "Alumno" at 76,25.5 h6.1 r90
  text "Square Lemon" at 39.5,21 h3.05
Bottom Overlay:
  lines w0.254: 85,20 85,30 ; 85,100 85,110 ; 95,20 95,30 ; 95,100 95,110
Mechanical 1:
  circle w0.254: c80,105 r3
  circle w0.254: c80,25 r3
  circle w0.254: c30,65 r15
  circle w0.254: c100,105 r3
  circle w0.254: c100,25 r3
  circle w0.254: c90,25 r3
  circle w0.254: c90,105 r3
  circle w0.254: c16.025,22.125 r1.1
  circle w0.254: c33.975,22.125 r1.1
  circle w0.254: c33.975,107.875 r1.1
  circle w0.254: c16.025,107.875 r1.1
  lines w0.254: 5,20 5,110 85,110 105,110 105,100 85,100 85,30 105,30 105,20 85,20 5,20
Mechanical 2:
  lines w0.254: 11.5,20 11.5,28.5 17.5,28.5 17.5,31.5 19,31.5 19,44 31,44 31,31.5 32.5,31.5 32.5,28.5 38.5,28.5 38.5,20 ; 11.5,110 11.5,101.5 17.5,101.5 17.5,98.5 19,98.5 19,86 31,86 31,98.5 32.5,98.5 32.5,101.5 38.5,101.5 38.5,110 ; 25,20 25,44

## Text inside footprints (layer, text, board x,y; h text height)
B1: Top Overlay "+" at 44.06,93.44 h1.52 r90